# EAGLE board ebook-reader v30 (EAGLE 9.7.0)

Size 170 x 111 mm. Coordinates in mm from the lower left corner, seen from the top.
Outline: 0,111 92,111 92,67 170,67 170,0 92,0 92,10 74,10 74,0 0,0 0,111
Copper layers (1*16): Top 0.035mm / dielectric 1.5mm / Bottom 0.035mm
Design rules "Fusion Electronics Design Rules": minimum track width 6mil, minimum drill 0.35mm, track to track 6mil, track to pad 6mil, pad to pad 6mil, via to via 6mil, smd to smd 6mil, copper to edge 40mil, drill to drill 6mil, minimum pad ring 10mil, minimum via ring 8mil, stop-mask expansion 4mil, vias tented up to drill 9999mil, thermal gap 10mil
Net classes: 1 Power: width 0.3 mm; 2 Rest: width 0.15 mm

## Footprints (pad centres in the part's own frame; a part is rotated, then mirrored left to right if it is on the bottom)
MYBUTTON = smd 1.4 x 1.05: 1 1.75,0.75; 2 -1.75,0.75; 3 -1.75,-0.75; 4 1.75,-0.75
EAGLE-LTSPICE_C0402 = smd 0.7 x 0.9: 1 -0.65,0; 2 0.65,0
RCL_CT3528 = smd 2 x 2.2: + -1.5,0; - 1.5,0
CAPCP3225X100N = smd 1.4 x 1.4: 1 -1.1,0; 2 1.1,0
ADAFRUIT_CHIP-LED0603 = smd 0.8 x 0.8: A 0,-0.75; C 0,0.75
SOT95P280X145-6N = smd 1.2 x 0.6: 1 -1.25,0.95; 2 -1.25,0; 3 -1.25,-0.95; 4 1.25,-0.95; 5 1.25,0; 6 1.25,0.95
ESP32_WROVER_AVX---SD0805S020S1R0_AVX_SD0805S020S1R0_0 = smd 0.8 x 0.9: 1 -1.05,0; 2 1.05,0
SOD3716X135N = smd 1.15 x 0.8: 1 -1.75,0; 2 1.75,0
DIOC1608X36N = smd 0.97 x 0.94: 1 -0.75,0; 2 0.75,0
SOT95P280X125-5N = smd 0.9 x 0.6: 1 -1.4,0.95; 2 -1.4,0; 3 -1.4,-0.95; 4 1.4,-0.95; 5 1.4,0.95
SOT95P280X120-5N = smd 0.9 x 0.6: 1 -1.4,0.95; 2 -1.4,0; 3 -1.4,-0.95; 4 1.4,-0.95; 5 1.4,0.95
FH34SRJ24S05SH99 = smd 0.3 x 0.8: 1 5.75,1.45; 2 5.25,1.45; 3 4.75,1.45; 4 4.25,1.45; 5 3.75,1.45; 6 3.25,1.45; 7 2.75,1.45; 8 2.25,1.45; 9 1.75,1.45; 10 1.25,1.45; 11 0.75,1.45; 12 0.25,1.45; 13 -0.25,1.45; 14 -0.75,1.45; 15 -1.25,1.45; 16 -1.75,1.45; 17 -2.25,1.45; 18 -2.75,1.45; 19 -3.25,1.45; 20 -3.75,1.45; 21 -4.25,1.45; 22 -4.75,1.45; 23 -5.25,1.45; 24 -5.75,1.45 | smd 0.4 x 0.8: MP1 6.75,-1.05; MP2 -6.75,-1.05
SAMACSYS_PARTS_USB4110GFA = smd 0.3 x 1.15: A1 -3.35,3.678; A4 -2.55,3.678; A5 -1.25,3.678; A6 -0.25,3.678; A7 0.25,3.678; A8 1.25,3.678; A9 2.55,3.678; A12 3.35,3.678; B1 3.05,3.678; B4 2.25,3.678; B5 1.75,3.678; B6 0.75,3.678; B7 -0.75,3.678; B8 -1.75,3.678; B9 -2.25,3.678; B12 -3.05,3.678 | smd 2.18 x 2: MP1 -5.11,-0.827; MP2 5.11,-0.827; MP3 -5.11,3.103; MP4 5.11,3.103 | hole 0.65: -2.89,2.603; 2.89,2.603
JST04_1MM_RA = smd 0.6 x 1.35: 1 -1.5,0; 2 -0.5,0; 3 0.5,0; 4 1.5,0 | smd 1.2 x 2: NC1 2.8,-3.675; NC2 -2.8,-3.675
112ATAARR03ATTEND = smd 1.8 x 1.2: G1 10.6,10.4; G2 4.9,10.4; S1 7.75,10.4; S2 2.05,10.4 | smd 1.4 x 1.9: G3 13.6,-3.85; G4 0.45,-2.85 | smd 0.7 x 1.5: P1 8.8,0; P2 7.7,0.4; P3 6.6,0; P4 5.5,-0.2; P5 4.4,0; P6 3.3,-0.2; P7 2.2,0; P8 1.1,0
IND_4828-WE-TPC_WRE = smd 0.889 x 4.826: 1 -2.286,0; 2 2.286,0
ESP32_WROVER_SPARKFUN-IC-POWER_SOT23-5 = smd 0.55 x 1.2: 1 -0.95,-1.3; 2 0,-1.3; 3 0.95,-1.3; 4 0.95,1.3; 5 -0.95,1.3
ESP32C6_VARISTOR_CT/CN1812 = smd 1.5 x 3.6: 1 -2.25,0; 2 2.25,0
ESP32_WROVER_SPARKFUN-DISCRETESEMI_SOT23-3 = smd 0.8 x 0.9: 1 -0.95,-1; 2 0.95,-1; 3 0,1.1
SOT65P210X110-3N = smd 1.05 x 0.5: 1 -1.05,0.65; 2 -1.05,-0.65; 3 1.05,0
ESP32_WROVER_EAGLE-LTSPICE_R0402 = smd 0.7 x 0.9: 1 -0.65,0; 2 0.65,0
ESP32_WROVER_BME680_PSON80P300X300X100-8N = smd 1.016 x 0.5: 1 1.458,1.2; 2 1.458,0.4; 3 1.458,-0.4; 4 1.458,-1.2; 5 -1.458,-1.22; 6 -1.458,-0.4; 7 -1.458,0.4; 8 -1.458,1.2
SJ = smd 1.168 x 1.6: 1 -0.762,0; 2 0.762,0
TP20R = smd 2 x 2: TP 0,0
SON127P600X800X80-9N = smd 0.94 x 0.44: 1 -3.895,1.905; 2 -3.895,0.635; 3 -3.895,-0.635; 4 -3.895,-1.905; 5 3.895,-1.905; 6 3.895,-0.635; 7 3.895,0.635; 8 3.895,1.905 | smd 3.4 x 4.3: 9 0,0
XCVR_ESP32-C6-WROOM-1-N8 = smd 1.5 x 0.9: 1 -8.75,5.26; 2 -8.75,3.99; 3 -8.75,2.72; 4 -8.75,1.45; 5 -8.75,0.18; 6 -8.75,-1.09; 7 -8.75,-2.36; 8 -8.75,-3.63; 9 -8.75,-4.9; 10 -8.75,-6.17; 11 -8.75,-7.44; 12 -8.75,-8.71; 13 -8.75,-9.98; 14 -8.75,-11.25; 15 8.75,-11.25; 16 8.75,-9.98; 17 8.75,-8.71; 18 8.75,-7.44; 19 8.75,-6.17; 20 8.75,-4.9; 21 8.75,-3.63; 22 8.75,-2.36; 23 8.75,-1.09; 24 8.75,0.18; 25 8.75,1.45; 26 8.75,2.72; 27 8.75,3.99; 28 8.75,5.26 | smd 0.8 x 0.8: 29_1 -2.755,0.79; 29_2 -1.505,0.79; 29_3 -0.255,0.79; 29_4 -2.755,-0.46; 29_5 -1.505,-0.46; 29_6 -0.255,-0.46; 29_7 -2.755,-1.71; 29_8 -1.505,-1.71; 29_9 -0.255,-1.71
SOIC127P1032X265-16N = smd 2.05 x 0.59: 1 -4.655,4.445; 2 -4.655,3.175; 3 -4.655,1.905; 4 -4.655,0.635; 5 -4.655,-0.635; 6 -4.655,-1.905; 7 -4.655,-3.175; 8 -4.655,-4.445; 9 4.655,-4.445; 10 4.655,-3.175; 11 4.655,-1.905; 12 4.655,-0.635; 13 4.655,0.635; 14 4.655,1.905; 15 4.655,3.175; 16 4.655,4.445
SON50P200X200X80-9N = smd 0.76 x 0.27: 1 -0.985,0.75; 2 -0.985,0.25; 3 -0.985,-0.25; 4 -0.985,-0.75; 5 0.985,-0.75; 6 0.985,-0.25; 7 0.985,0.25; 8 0.985,0.75 | smd 0.9 x 1.3: 9 0,0

## Placement (x,y rotation side)
BOOT_BUTTON  BUTTON_CUSYOMV1  [MYBUTTON]  25.02,108.63 180 top
C1  100nF  [EAGLE-LTSPICE_C0402]  113.44,59.63 0 top
C1_BAT  4.7uF  [EAGLE-LTSPICE_C0402]  104.23,52.55 0 top
C1_BAT1  4.7uF  [EAGLE-LTSPICE_C0402]  101.68,37.47 0 top
C1_BAT2  4.7uF  [EAGLE-LTSPICE_C0402]  99.52,42.47 90 top
C2  100nF  [EAGLE-LTSPICE_C0402]  119.82,59.63 0 top
C2_BAT  4.7uF  [EAGLE-LTSPICE_C0402]  129.34,27.55 0 top
C3  100uF  [RCL_CT3528]  118.09,40.8 90 top
C4  4.7uF/25V  [EAGLE-LTSPICE_C0402]  85.41,39.39 0 top
C4_USB  100nF  [EAGLE-LTSPICE_C0402]  29.53,86.47 90 top
C5  1uF  [EAGLE-LTSPICE_C0402]  53.49,94.71 0 top
C5_USB  4.7uF  [EAGLE-LTSPICE_C0402]  25.64,86.47 90 top
C6  100nF  [EAGLE-LTSPICE_C0402]  125.2,59.63 0 top
C7  10uF  [EAGLE-LTSPICE_C0402]  77.99,29.63 180 top
C8  100nF  [EAGLE-LTSPICE_C0402]  85.58,51.63 0 top
C9  100nF  [EAGLE-LTSPICE_C0402]  4.96,98.63 90 top
C10  100nF  [EAGLE-LTSPICE_C0402]  72.34,96.63 0 top
C10_SUPERCAP  CPH3225A  [CAPCP3225X100N]  94.09,54.04 90 top
C_DELAY  100nF  [EAGLE-LTSPICE_C0402]  44.77,102.39 0 top
CHANGE_BUTTON  BUTTON_CUSYOMV1  [MYBUTTON]  73.04,108.63 180 top
CHG_LED  [ADAFRUIT_CHIP-LED0603]  110.34,52.75 90 top
D1  USBLC6-2SC6Y  [SOT95P280X145-6N]  148.72,53.79 0 top
D2  ESP32_WROVER_AVX---SD0805S020S1R0_AVX_SD0805S020S1R0_0_0AVX_SD0805S020S1R0_0_0  [ESP32_WROVER_AVX---SD0805S020S1R0_AVX_SD0805S020S1R0_0]  123.55,40.68 90 top
D3  MBR0530  [SOD3716X135N]  86.72,34.87 0 top
D4  MBR0530  [SOD3716X135N]  86.56,30.87 0 top
D5  MBR0530  [SOD3716X135N]  77.22,39.95 0 top
D6  PGB1010603MR  [DIOC1608X36N]  70.02,24.79 0 top
D7  ESP32_WROVER_AVX---SD0805S020S1R0_AVX_SD0805S020S1R0_0_0AVX_SD0805S020S1R0_0_0  [ESP32_WROVER_AVX---SD0805S020S1R0_AVX_SD0805S020S1R0_0]  87.2,68.68 0 top
D8  PGB1010603MR  [DIOC1608X36N]  35.95,47.87 90 top
D9  PGB1010603MR  [DIOC1608X36N]  12.33,98.87 0 top
D10  PGB1010603MR  [DIOC1608X36N]  46.71,43.87 90 top
D11  PGB1010603MR  [DIOC1608X36N]  43.09,43.87 90 top
D12  PGB1010603MR  [DIOC1608X36N]  39.47,43.87 90 top
EPD_C1  1uF/50V  [EAGLE-LTSPICE_C0402]  88.75,17.47 90 top
EPD_C2  1uF/50V  [EAGLE-LTSPICE_C0402]  86.68,17.55 90 top
EPD_C5  0.1uF/50V  [EAGLE-LTSPICE_C0402]  85.25,17.39 90 top
EPD_C6  1uF/50V  [EAGLE-LTSPICE_C0402]  81.79,17.55 90 top
EPD_C7  1uF/50V  [EAGLE-LTSPICE_C0402]  79.9,17.55 90 top
EPD_C8  1uF/50V  [EAGLE-LTSPICE_C0402]  78.46,17.55 90 top
EPD_C9  1uF/50V  [EAGLE-LTSPICE_C0402]  77.12,17.55 90 top
EPD_C10  1uF/50V  [EAGLE-LTSPICE_C0402]  75.61,18.09 90 top
EPD_C11  1uF/50V  [EAGLE-LTSPICE_C0402]  71.29,13.39 90 top
EPD_C12  1uF/50V  [EAGLE-LTSPICE_C0402]  69.45,13.39 90 top
IC1  BD5229G-TR  [SOT95P280X125-5N]  45.69,94.79 0 top
IC4  XC6220A331MR-G  [SOT95P280X120-5N]  79.93,50.79 0 top
J1  FH34SRJ-24S-0.5SH_99_  [FH34SRJ24S05SH99]  82.87,13.04 0 top
J2  SAMACSYS_PARTS_USB4110-GF-A  [SAMACSYS_PARTS_USB4110GFA]  165.09,50.56 90 top
J3  QWIIC_RIGHT_ANGLE  [JST04_1MM_RA]  164.23,19.96 90 top
J4  112A-TAAR-R03_ATTEND  [112ATAARR03ATTEND]  5.89,94.66 270 top
L1  68uH  [IND_4828-WE-TPC_WRE]  77.47,35.05 0 top
MCP73831  ESP32_WROVER_SPARKFUN-IC-POWER_MCP73831  [ESP32_WROVER_SPARKFUN-IC-POWER_SOT23-5]  114.12,53.69 0 top
PFMF.050.1  ESP32C6_VARISTORCN1812  [ESP32C6_VARISTOR_CT/CN1812]  148.44,46.8 0 top
Q1  20V/4.2A/52mΩ/1.4W  [ESP32_WROVER_SPARKFUN-DISCRETESEMI_SOT23-3]  109.26,34.56 0 top
Q2  20V/4.2A/52mΩ/1.4W  [ESP32_WROVER_SPARKFUN-DISCRETESEMI_SOT23-3]  92.18,26.56 0 top
Q3  SI1308EDL-T1-GE3  [SOT65P210X110-3N]  58.25,12.95 90 top
R1  10K  [ESP32_WROVER_EAGLE-LTSPICE_R0402]  15.83,43.63 90 top
R1_BAT  200  [ESP32_WROVER_EAGLE-LTSPICE_R0402]  132.45,35.55 0 top
R1_PINH  10K  [ESP32_WROVER_EAGLE-LTSPICE_R0402]  154.36,7.47 90 top
R1_PINH1  10K  [ESP32_WROVER_EAGLE-LTSPICE_R0402]  20.56,43.04 0 top
R1_PWRUSB  100K  [ESP32_WROVER_EAGLE-LTSPICE_R0402]  103.15,42.04 90 top
R2  2.2  [ESP32_WROVER_EAGLE-LTSPICE_R0402]  55.41,8.71 0 top
R2-PINH  10K  [ESP32_WROVER_EAGLE-LTSPICE_R0402]  156.42,7.47 90 top
R2-PINH1  10K  [ESP32_WROVER_EAGLE-LTSPICE_R0402]  94.93,58.39 90 top
R2-USB  5K1  [ESP32_WROVER_EAGLE-LTSPICE_R0402]  160.68,40.63 0 top
R2-USB1  5k1  [ESP32_WROVER_EAGLE-LTSPICE_R0402]  165.2,40.47 0 top
R2_BAT  2K  [ESP32_WROVER_EAGLE-LTSPICE_R0402]  120.56,28.55 0 top
R3  0.47  [ESP32_WROVER_EAGLE-LTSPICE_R0402]  63.91,8.63 90 top
R4  10K  [ESP32_WROVER_EAGLE-LTSPICE_R0402]  62.75,13.63 0 top
R5  0Ω  [ESP32_WROVER_EAGLE-LTSPICE_R0402]  33.31,47.87 90 top
R6  0Ω  [ESP32_WROVER_EAGLE-LTSPICE_R0402]  30.5,38.87 90 top
R7  0Ω  [ESP32_WROVER_EAGLE-LTSPICE_R0402]  33.69,38.87 90 top
R8  0Ω  [ESP32_WROVER_EAGLE-LTSPICE_R0402]  36.88,38.87 90 top
R9  0Ω  [ESP32_WROVER_EAGLE-LTSPICE_R0402]  67.07,31.87 0 top
R10  0Ω  [ESP32_WROVER_EAGLE-LTSPICE_R0402]  9.12,98.87 90 top
R_BOOT  10K  [ESP32_WROVER_EAGLE-LTSPICE_R0402]  23.31,102.47 0 top
R_CAPACITOR  15  [ESP32_WROVER_EAGLE-LTSPICE_R0402]  89.85,54.04 90 top
R_CHANGE  10K  [ESP32_WROVER_EAGLE-LTSPICE_R0402]  72.72,102.04 0 top
R_CL1  10K  [ESP32_WROVER_EAGLE-LTSPICE_R0402]  67.06,37.63 0 top
R_RESET  10K  [ESP32_WROVER_EAGLE-LTSPICE_R0402]  92.09,48.39 0 top
RESET_BUTTON  BUTTON_CUSYOMV1  [MYBUTTON]  45.53,108.63 180 top
SENSOR2  ESP32_WROVER_BME680_BME680  [ESP32_WROVER_BME680_PSON80P300X300X100-8N]  155.25,11.42 90 top
SJ1  [SJ]  60.36,8.79 0 top
TP1  TPTP20R  [TP20R]  12.53,68.71 0 top
TP2  TPTP20R  [TP20R]  17.45,68.71 0 top
TP3  TPTP20R  [TP20R]  131.37,53.71 0 top
TP4  TPTP20R  [TP20R]  135.29,53.71 0 top
TP5  TPTP20R  [TP20R]  131.49,49.79 0 top
TP6  TPTP20R  [TP20R]  4.41,75.79 0 top
TP7  TPTP20R  [TP20R]  8.33,75.79 0 top
TP8  TPTP20R  [TP20R]  12.25,75.79 0 top
TP9  TPTP20R  [TP20R]  103.17,19.79 0 top
TP10  TPTP20R  [TP20R]  104.06,15.71 0 top
TP11  TPTP20R  [TP20R]  98.61,19.71 0 top
TP12  TPTP20R  [TP20R]  98.71,15.71 0 top
TP13  TPTP20R  [TP20R]  94.36,15.71 0 top
TP14  TPTP20R  [TP20R]  135.01,49.71 0 top
TP15  TPTP20R  [TP20R]  80.66,68.71 0 top
TP16  TPTP20R  [TP20R]  10.31,43.71 0 top
TP17  TPTP20R  [TP20R]  93.96,19.71 0 top
U1  W25Q512JVEIQ  [SON127P600X800X80-9N]  38.69,59.56 0 top
U2  ESP32-C6-WROOM-1-N8  [XCVR_ESP32-C6-WROOM-1-N8]  14.19,56.41 90 top
U3  DS3231SN#  [SOIC127P1032X265-16N]  79.95,60.1 90 top
U4  MAX17048G+T10  [SON50P200X200X80-9N]  126.61,48.42 0 top

## Library data of the parts
BOOT_BUTTON CHANGE_BUTTON CHG_LED PFMF.050.1 RESET_BUTTON SJ1 TP1-TP17 = DeskAssistant v19 v1
C1 C1_BAT C1_BAT1 C1_BAT2 C2 C2_BAT C4 C4_USB C5 C5_USB C6-C10 C_DELAY EPD_C1 EPD_C2 EPD_C5-EPD_C12 = DeskAssistant v19 v1; SPICEMODEL: NONE; SPICEPREFIX: C
C3 = DeskAssistant v19 v1; SPICEPREFIX: C
C10_SUPERCAP = DeskAssistant v19 v1; AVAILABILITY: Not in stock; CHECK_PRICES: https://www.snapeda.com/parts/CPH3225A/Seiko+Instruments/view-part/?ref=eda; DESCRIPTION: 11 mF (EDLC) Supercapacitor 3.3 V 1210 (3225 Metric) - -; MF: Seiko Instruments; MP: CPH3225A; PACKAGE: 1210 Seiko; PRICE: None; PURCHASE-URL: https://www.snapeda.com/api/url_track_click_mouser/?unipart_id=562593&manufacturer=Seiko Instruments&part_name=CPH3225A&search_term=None; SNAPEDA_LINK: https://www.snapeda.com/parts/CPH3225A/Seiko+Instruments/view-part/?ref=snap
D1 = DeskAssistant v19 v1; AVAILABILITY: In Stock; CHECK_PRICES: https://www.snapeda.com/parts/USBLC6-2SC6Y/STMicroelectronics/view-part/?ref=eda; DESCRIPTION: 17V Clamp 5A (8/20µs) Ipp Tvs Diode Surface Mount SOT-23-6; MF: STMicroelectronics; MP: USBLC6-2SC6Y; PACKAGE: SOT-23-6 STMicroelectronics; PRICE: None; SNAPEDA_LINK: https://www.snapeda.com/parts/USBLC6-2SC6Y/STMicroelectronics/view-part/?ref=snap
D2 D7 = DeskAssistant v19 v1; CENTROID_NOT_SPECIFIED: No; DATASHEET: http://datasheets.avx.com/schottky.pdf; DIGIKEY_DESCRIPTION: DIODE SCHOTTKY 20V 1A 0805; DIGIKEY_PART_NUMBER: 478-7800-1-ND; LEAD_FREE: yes; MF: AVX; MOUSER_PART_NUMBER: 581-SD0805S020S1R0; PACKAGE: 0805 (2012 metric); PREFIX: D; ROHS: yes; TEMPERATURE_RANGE_HIGH: +125°C; TEMPERATURE_RANGE_LOW: -55°C
D3-D5 = DeskAssistant v19 v1; AVAILABILITY: In Stock; CHECK_PRICES: https://www.snapeda.com/parts/MBR0530/Onsemi/view-part/?ref=eda; DESCRIPTION: Diode Schottky 30 V 500mA Surface Mount SOD-123; MF: ON Semiconductor; MP: MBR0530; PACKAGE: SOD-123-2 ON Semiconductor; PRICE: None; PURCHASE-URL: https://www.snapeda.com/api/url_track_click_mouser/?unipart_id=179458&manufacturer=ON Semiconductor&part_name=MBR0530&search_term=None; SNAPEDA_LINK: https://www.snapeda.com/parts/MBR0530/Onsemi/view-part/?ref=snap
D6 D8-D12 = DeskAssistant v19 v1; AVAILABILITY: In Stock; CHECK_PRICES: https://www.snapeda.com/parts/PGB1010603MR/Littelfuse/view-part/?ref=eda; DESCRIPTION: 150V (Typ) Clamp - Ipp Tvs Diode Surface Mount 0603 (1608 Metric); MF: Littelfuse Inc.; MP: PGB1010603MR; PACKAGE: 0603 Littelfuse Inc.; PRICE: None; PURCHASE-URL: https://www.snapeda.com/api/url_track_click_mouser/?unipart_id=5659453&manufacturer=Littelfuse Inc.&part_name=PGB1010603MR&search_term=None; SNAPEDA_LINK: https://www.snapeda.com/parts/PGB1010603MR/Littelfuse/view-part/?ref=snap
IC1 = DeskAssistant v19 v1; DESCRIPTION: Voltage Detector with Adjustable Delay Time: CMOS processes are utilized to develop high precision, low current consumption CMOS reset ICs that allow arbitrary setting of the delay time. The extensive lineup includes both Nch Open Drain and CMOS output types in a wide range of detection voltages (from 2.3V to 6.0V, in 0.1V steps), enabling selection of the ideal solution based on customer requirements. In addition, the entire series is of course both lead-free and RoHS-compliant.; HEIGHT: 1.25mm; MANUFACTURER_NAME: ROHM Semiconductor; MANUFACTURER_PART_NUMBER: BD5229G-TR; MOUSER_PART_NUMBER: 755-BD5229G-TR; MOUSER_PRICE-STOCK: https://www.mouser.co.uk/ProductDetail/ROHM-Semiconductor/BD5229G-TR?qs=4kLU8WoGk0vvnhrrYwdszw%3D%3D
IC4 = DeskAssistant v19 v1; DESCRIPTION: LDO Voltage Regulators; HEIGHT: 1.2mm; MANUFACTURER_NAME: Torex; MANUFACTURER_PART_NUMBER: XC6220A331MR-G; MOUSER_PART_NUMBER: 865-XC6220A331MR-G; MOUSER_PRICE-STOCK: https://www.mouser.co.uk/ProductDetail/Torex-Semiconductor/XC6220A331MR-G?qs=AsjdqWjXhJ8ZSWznL1J0gg%3D%3D
J1 = DeskAssistant v19 v1; DESCRIPTION: 24 Position FFC, FPC Connector Contacts, Top and Bottom 0.020" (0.50mm) Surface Mount, Right Angle; HEIGHT: 1.1mm; MANUFACTURER_NAME: Hirose; MANUFACTURER_PART_NUMBER: FH34SRJ-24S-0.5SH(99); MOUSER_PART_NUMBER: 798-FH34SRJ24S05SH99; MOUSER_PRICE-STOCK: https://www.mouser.co.uk/ProductDetail/Hirose-Connector/FH34SRJ-24S-0.5SH99?qs=vcbW%252B4%252BSTIpKBl5ap9J8Fw%3D%3D
J2 = DeskAssistant v19 v1; DESCRIPTION: CONN USB 2.0 TYPE-C R/A SMT; HEIGHT: 3.26mm; MANUFACTURER_NAME: GCT (GLOBAL CONNECTOR TECHNOLOGY); MANUFACTURER_PART_NUMBER: USB4110-GF-A; MOUSER_PART_NUMBER: 640-USB4110-GF-A; MOUSER_PRICE-STOCK: https://www.mouser.co.uk/ProductDetail/GCT/USB4110-GF-A?qs=KUoIvG%2F9IlYiZvIXQjyJeA%3D%3D
J3 = DeskAssistant v19 v1; PROD_ID: CONN-13694
J4 = DeskAssistant v19 v1; DESCRIPTION: Micro SD Card Socket, Push-Push Type, Top Mount, SMT, H=1.83mm, 10u; HEIGHT: 1.9mm; MANUFACTURER_NAME: ATTEND; MANUFACTURER_PART_NUMBER: 112A-TAAR-R03 ATTEND
L1 = DeskAssistant v19 v1; COPYRIGHT: Copyright (C) 2024 Ultra Librarian. All rights reserved.; MANUFACTURER_PART_NUMBER: 744043680; MFR_NAME: Wurth Electronics
MCP73831 = DeskAssistant v19 v1; PROD_ID: IC-09995
Q1 Q2 = DeskAssistant v19 v1; PROD_ID: TRAN-14388
Q3 = DeskAssistant v19 v1; AVAILABILITY: In Stock; CHECK_PRICES: https://www.snapeda.com/parts/SI1308EDL-T1-GE3/Vishay+Siliconix/view-part/?ref=eda; DESCRIPTION: Si1308EDL-T1-GE3 N-channel MOSFET Transistor, 1.5 A, 30 V, 3-Pin SC-70 | Siliconix / Vishay SI1308EDL-T1-GE3; MF: Vishay Siliconix; MP: SI1308EDL-T1-GE3; PACKAGE: SOT-323 Vishay Semiconductor; PRICE: None; PURCHASE-URL: https://www.snapeda.com/api/url_track_click_mouser/?unipart_id=274603&manufacturer=Vishay Siliconix&part_name=SI1308EDL-T1-GE3&search_term=None; SNAPEDA_LINK: https://www.snapeda.com/parts/SI1308EDL-T1-GE3/Vishay+Siliconix/view-part/?ref=snap
R1 R1_BAT R1_PINH R1_PINH1 R1_PWRUSB R2 R2-PINH R2-PINH1 R2-USB R2-USB1 R2_BAT R3-R10 R_BOOT R_CAPACITOR R_CHANGE R_CL1 R_RESET = DeskAssistant v19 v1; SPICEMODEL: NONE; SPICEPREFIX: R
SENSOR2 = DeskAssistant v19 v1; AVAILABILITY: Unavailable; DESCRIPTION: Integrated Environmental Unit; MF: Bosch Sensortec; MP: BME680; PACKAGE: LGA-8 Bosch Tools; PRICE: None
U1 = DeskAssistant v19 v1; AVAILABILITY: In Stock; CHECK_PRICES: https://www.snapeda.com/parts/W25Q512JVEIQ/Winbond+Electronics/view-part/?ref=eda; DESCRIPTION: FLASH - NOR Memory IC 512Mb (64M x 8) SPI - Quad I/O 133 MHz 8-WSON (8x6); MF: Winbond Electronics; MP: W25Q512JVEIQ; PACKAGE: Package; PRICE: None; SNAPEDA_LINK: https://www.snapeda.com/parts/W25Q512JVEIQ/Winbond+Electronics/view-part/?ref=snap
U2 = DeskAssistant v19 v1; AVAILABILITY: In Stock; CHECK_PRICES: https://www.snapeda.com/parts/ESP32-C6-WROOM-1-N8/Espressif+Systems/view-part/?ref=eda; DESCRIPTION: Multiprotocol Modules ESP32-C6 module, Wi-Fi 6 in 2.4 GHz band, Bluetooth 5, Zigbee 3.0 and Thread. ESP34-WROOM Compatible - ENGINEERING SAMPLE; MF: Espressif Systems; MP: ESP32-C6-WROOM-1-N8; PACKAGE: None; PRICE: None; SNAPEDA_LINK: https://www.snapeda.com/parts/ESP32-C6-WROOM-1-N8/Espressif+Systems/view-part/?ref=snap
U3 = DeskAssistant v19 v1; AVAILABILITY: In Stock; CHECK_PRICES: https://www.snapeda.com/parts/DS3231SN%23/Analog+Devices/view-part/?ref=eda; DESCRIPTION: Extremely Accurate I²C-Integrated RTC/TCXO/Crystal; MF: Analog Devices; MP: DS3231SN#; PACKAGE: SOIC-16 Maxim; PRICE: None; PURCHASE-URL: https://www.snapeda.com/api/url_track_click_mouser/?unipart_id=99048&manufacturer=Analog Devices&part_name=DS3231SN#&search_term=None; SNAPEDA_LINK: https://www.snapeda.com/parts/DS3231SN%23/Analog+Devices/view-part/?ref=snap
U4 = DeskAssistant v19 v1; AVAILABILITY: In Stock; CHECK_PRICES: https://www.snapeda.com/parts/MAX17048G+T10/Analog+Devices/view-part/?ref=eda; DESCRIPTION: 3µA 1-Cell/2-Cell Fuel Gauge with ModelGauge; MF: Analog Devices; MP: MAX17048G+T10; PACKAGE: TDFN-8 Maxim; PRICE: None; PURCHASE-URL: https://www.snapeda.com/api/url_track_click_mouser/?unipart_id=329239&manufacturer=Analog Devices&part_name=MAX17048G+T10&search_term=None; SNAPEDA_LINK: https://www.snapeda.com/parts/MAX17048G+T10/Analog+Devices/view-part/?ref=snap

## Nets
3V3: C1_BAT2.1 C3.+ C9.1 D7.2 IC1.2 IC4.5 J3.2 J4.P4 Q2.3 R1.2 R1_PINH1.2 R2-PINH1.2 R5.2 R6.2 R7.2 R8.2 R9.2 R10.2 R_BOOT.2 R_CHANGE.2 R_CL1.2 R_RESET.2 TP16.TP U1.3 U1.7 U1.8 U2.2 U3.2
32KHZ [Rest]: R2-PINH1.1 U2.9 U3.1
DN [Rest]: D1.1 J2.A7 J2.B7
DP [Rest]: D1.3 J2.A6 J2.B6
EPD_3V3: C7.1 EPD_C5.2 J1.15 J1.16 L1.2 Q2.2 TP17.TP
EPD_3V3_C: Q2.1 R_CL1.1 TP13.TP U2.18
EPD_BUSY [Rest]: J1.9 TP9.TP U2.26
EPD_CS [Rest]: D11.2 J1.12 R9.1 TP10.TP U2.11
EPD_DC [Rest]: J1.11 TP11.TP U2.5
EPD_RST [Rest]: J1.10 TP12.TP U2.21
FLASH_CS [Rest]: D10.2 R8.1 U1.1 U2.12
GDR [Rest]: J1.2 Q3.1 R4.2
GND [Rest]: BOOT_BUTTON.1 BOOT_BUTTON.2 C1.2 C1_BAT1.2 C1_BAT2.2 C1_BAT.2 C2.2 C2_BAT.2 C3.- C4_USB.2 C5.2 C5_USB.2 C6.2 C7.2 C8.2 C9.2 C10.2 C10_SUPERCAP.1 C_DELAY.2 CHANGE_BUTTON.1 CHANGE_BUTTON.2 D1.5 D3.1 D6.1 D8.1 D9.1 D10.1 D11.1 D12.1 EPD_C1.1 EPD_C2.1 EPD_C12.1 IC1.3 IC4.2 J1.8 J1.17 J1.MP1 J1.MP2 J2.A1 J2.A12 J2.B1 J2.B12 J2.MP1 J2.MP2 J2.MP3 J2.MP4 J3.1 J4.G1 J4.G2 J4.G3 J4.G4 J4.P6 MCP73831.2 R1_PWRUSB.1 R2-USB1.1 R2-USB.2 R2.1 R2_BAT.1 R4.1 RESET_BUTTON.1 RESET_BUTTON.2 SENSOR2.1 SENSOR2.5 SENSOR2.7 SJ1.1 TP4.TP TP5.TP U1.4 U1.9 U2.1 U2.28 U2.29_1 U2.29_2 U2.29_3 U2.29_4 U2.29_5 U2.29_6 U2.29_7 U2.29_8 U2.29_9 U3.13 U4.1 U4.4 U4.6 U4.9
GPIO8 [Rest]: R1.1 U2.10
I2C_PW [Rest]: C1.1 C2.1 R1_PINH.2 R2-PINH.2 SENSOR2.2 SENSOR2.6 SENSOR2.8 U2.17
INT_RTC [Rest]: R1_PINH1.1 TP15.TP U2.8 U3.3
IO/BOOT [Rest]: BOOT_BUTTON.3 BOOT_BUTTON.4 C6.1 R_BOOT.1 U2.15
IO/CHANGE [Rest]: C10.1 CHANGE_BUTTON.4 R_CHANGE.1 U2.23
MISO [Rest]: D6.2 J4.P7 R5.1 TP6.TP U1.2 U2.27
MOSI [Rest]: D9.2 J1.14 J4.P3 R6.1 TP7.TP U1.5 U2.7
N$1 [Rest]: J2.A5 J2.A8 R2-USB1.2
N$2 [Rest]: J2.B5 R2-USB.1
N$4 [Rest]: Q1.3
N$5 [Rest]: C1_BAT1.1 D2.1 IC4.1 IC4.3 Q1.2
N$7 [Rest]: CHG_LED.C R1_BAT.1
N$8 [Rest]: C4.1 D3.2 D4.1
N$9 [Rest]: MCP73831.1 R1_BAT.2
N$10 [Rest]: MCP73831.5 R2_BAT.2
N$11 [Rest]: EPD_C1.2 J1.4
N$12 [Rest]: EPD_C2.2 J1.5
N$13 [Rest]: C_DELAY.1 IC1.5
N$14 [Rest]: D7.1 R_CAPACITOR.1
N$15 [Rest]: EPD_C12.2 J1.24
N$16 [Rest]: EPD_C10.2 J1.22
N$17 [Rest]: EPD_C9.1 EPD_C11.2 J1.21 J1.23
N$18 [Rest]: EPD_C8.2 J1.20
N$19 [Rest]: EPD_C7.2 J1.19
N$20 [Rest]: EPD_C6.2 J1.18
PREVGH [Rest]: D5.1
PREVGL [Rest]: D4.2 EPD_C5.1 EPD_C6.1 EPD_C7.1 EPD_C8.1 EPD_C9.2 EPD_C10.1 EPD_C11.1
RESE [Rest]: J1.3 Q3.2 R3.2
RESE' [Rest]: R2.2 R3.1 SJ1.2
RESET [Rest]: C5.1 IC1.1 R_RESET.1 RESET_BUTTON.3 RESET_BUTTON.4 U2.3
RTC_RST [Rest]: U2.16 U3.4
RX [Rest]: TP2.TP U2.24
SCK [Rest]: D8.2 J1.13 J4.P5 R7.1 TP8.TP U1.6 U2.6
SCL [Rest]: J3.4 R2-PINH.1 SENSOR2.4 U2.20 U3.16 U4.7
SDA [Rest]: J3.3 R1_PINH.1 SENSOR2.3 U2.19 U3.15 U4.8
SRC [Rest]: C4.2 D5.2 L1.1 Q3.3
SS_SD [Rest]: D12.2 J4.P2 R10.1 U2.4
TX [Rest]: TP1.TP U2.25
USB_D+ [Rest]: D1.4 U2.14
USB_D- [Rest]: D1.6 U2.13
VBAT: C2_BAT.1 D2.2 MCP73831.3 Q1.1 R1_PWRUSB.2 TP3.TP U4.2 U4.3
VBUS: C1_BAT.1 C4_USB.1 C5_USB.1 CHG_LED.A D1.2 MCP73831.4 PFMF.050.1.2 TP14.TP
VRTC [Rest]: C8.1 C10_SUPERCAP.2 R_CAPACITOR.2 U3.14
VUSB: J2.A4 J2.A9 J2.B4 J2.B9 PFMF.050.1.1

## Tracks (layer width: path | path; a pad name or v marks a point on that pad's centre or on a via)
3V3  (27 unrouted)
32KHZ  (2 unrouted)
DN  (2 unrouted)
DP  (2 unrouted)
EPD_3V3  (6 unrouted)
EPD_3V3_C  (3 unrouted)
EPD_BUSY  (2 unrouted)
EPD_CS  (4 unrouted)
EPD_DC  (2 unrouted)
EPD_RST  (2 unrouted)
FLASH_CS  (3 unrouted)
GDR  (2 unrouted)
GND  (84 unrouted)
GPIO8  (1 unrouted)
I2C_PW  (7 unrouted)
INT_RTC  (3 unrouted)
IO/BOOT  (4 unrouted)
IO/CHANGE  (3 unrouted)
MISO  (5 unrouted)
MOSI  (6 unrouted)
N$1  (2 unrouted)
N$2  (1 unrouted)
N$5  (4 unrouted)
N$7  (1 unrouted)
N$8  (2 unrouted)
N$9  (1 unrouted)
N$10  (1 unrouted)
N$11  (1 unrouted)
N$12  (1 unrouted)
N$13  (1 unrouted)
N$14  (1 unrouted)
N$15  (1 unrouted)
N$16  (1 unrouted)
N$17  (3 unrouted)
N$18  (1 unrouted)
N$19  (1 unrouted)
N$20  (1 unrouted)
PREVGL  (7 unrouted)
RESE  (2 unrouted)
RESE'  (2 unrouted)
RESET  (5 unrouted)
RTC_RST  (1 unrouted)
RX  (1 unrouted)
SCK  (6 unrouted)
SCL  (5 unrouted)
SDA  (5 unrouted)
SRC  (3 unrouted)
SS_SD  (3 unrouted)
TX  (1 unrouted)
USB_D+  (1 unrouted)
USB_D-  (1 unrouted)
VBAT  (7 unrouted)
VBUS  (7 unrouted)
VRTC  (3 unrouted)
VUSB  (4 unrouted)